# Altium PCB EthernetShield.PcbDoc
Units mil, origin at the board's own origin, x right, y up, seen from the top; angles counter-clockwise.
Board outline 1375 x 745 mil, 2 copper layers (Top Layer, Bottom Layer); 7 components, 12 nets, 38 pads, 16 vias.
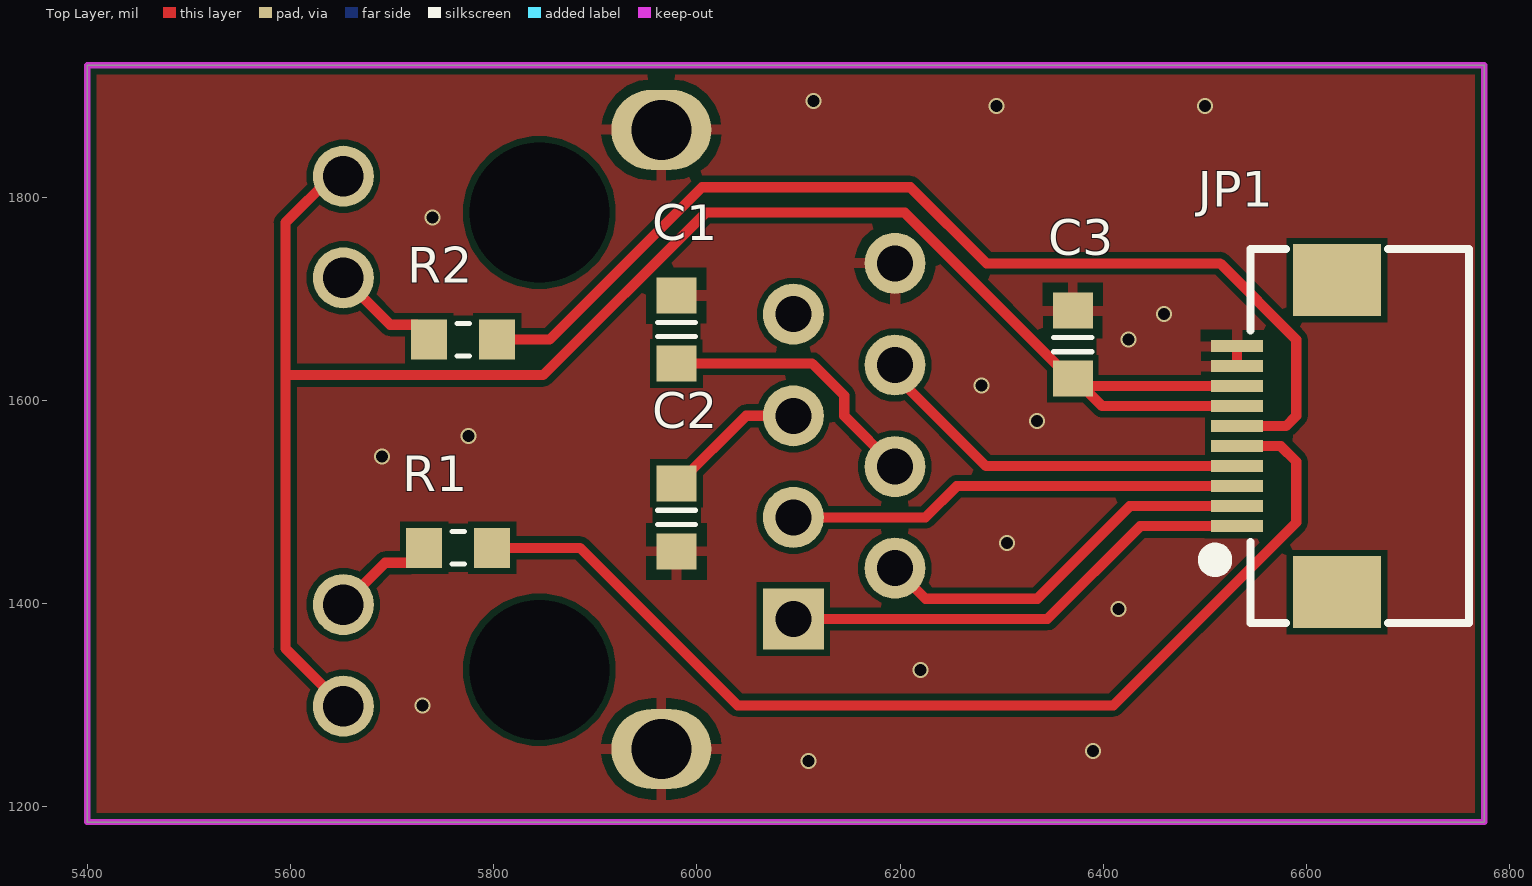
[diagram p0: Top Layer view]
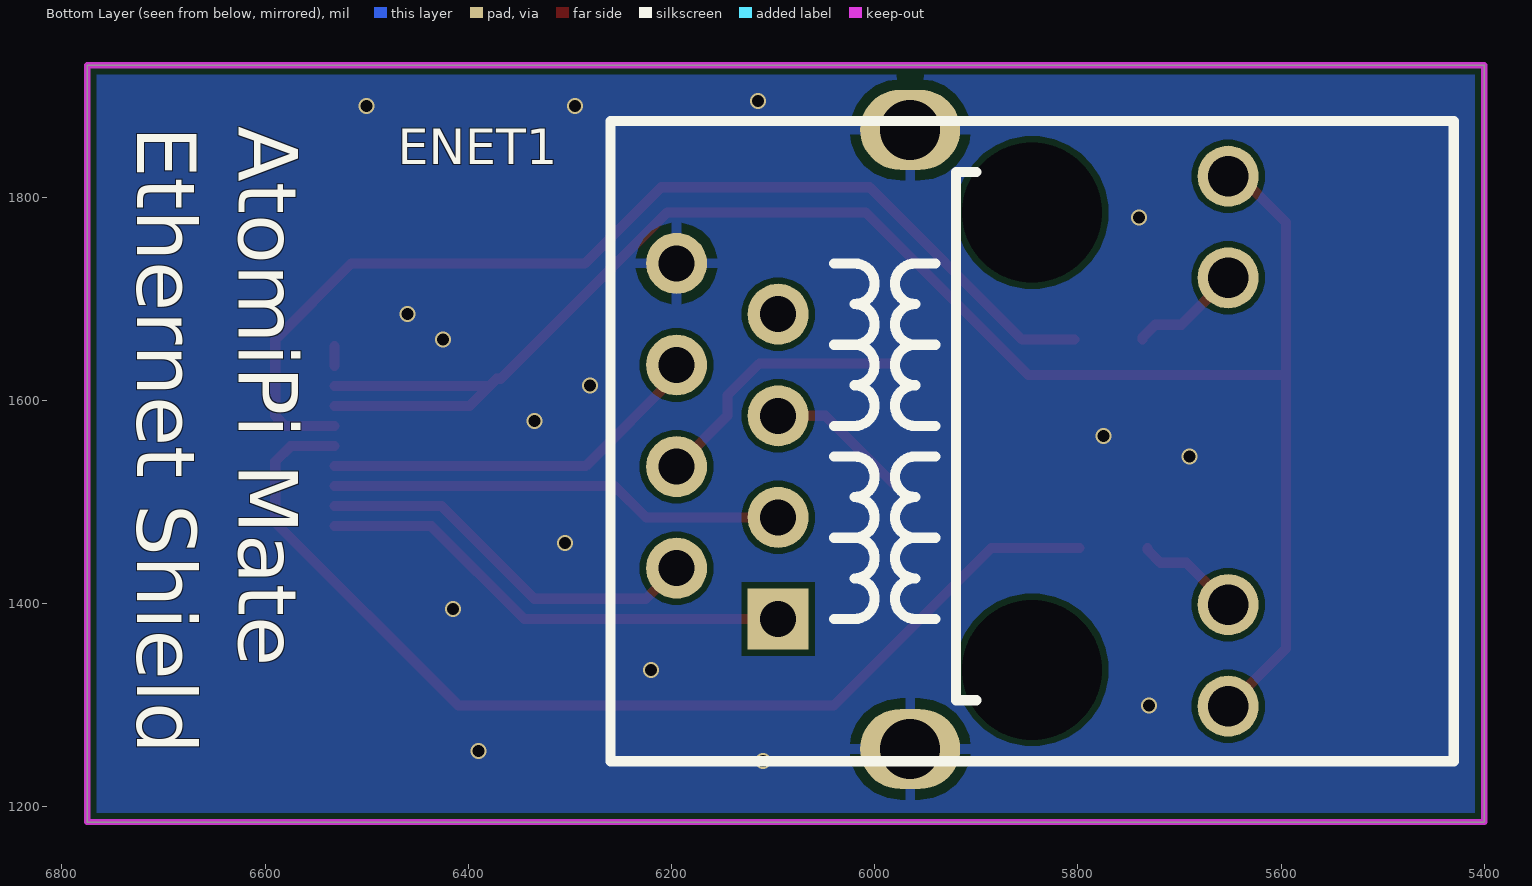
[diagram p1: Bottom Layer view, seen from below]
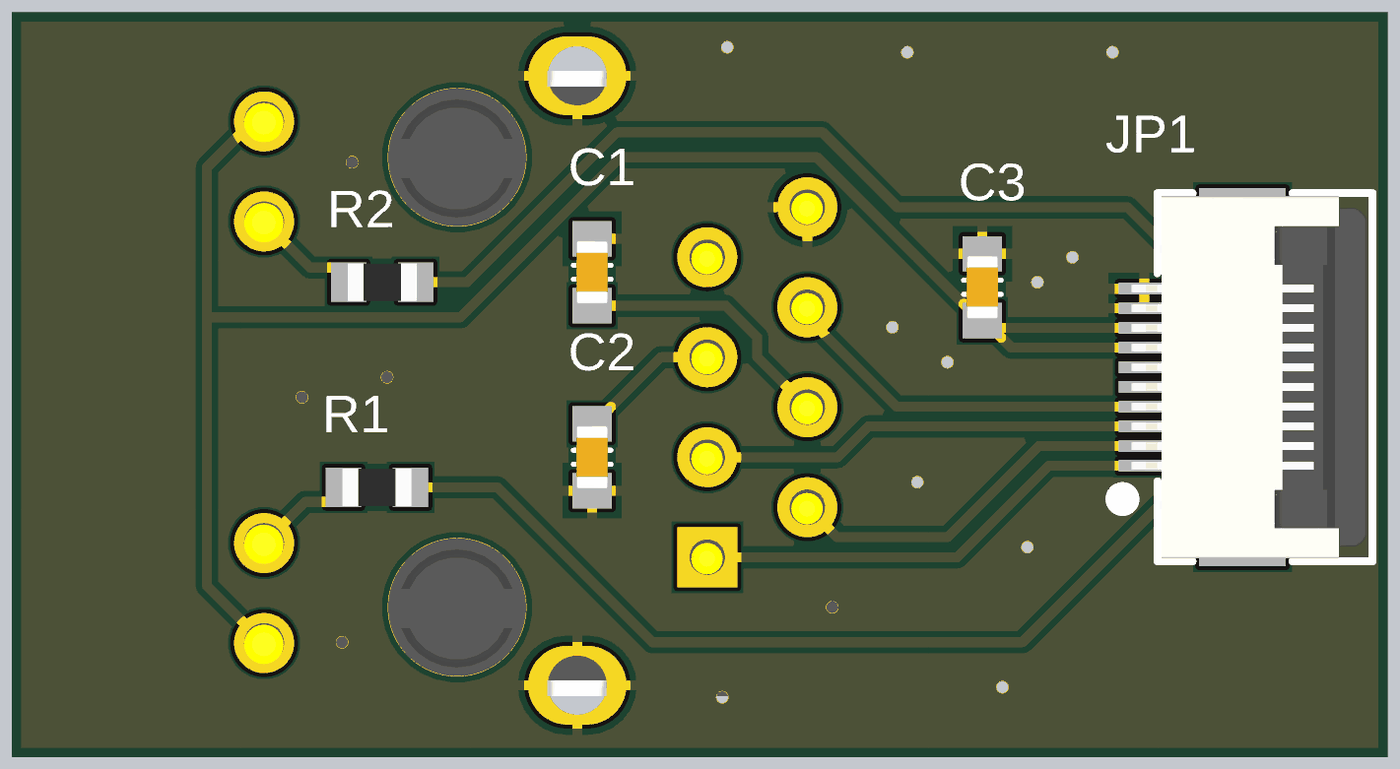
[diagram p2: 3D render of the assembled board from above, using the file's embedded part models]

## Layer stack, top to bottom
Top Solder: solder mask 0.4, Solder Resist, Dk 3.5
Top Layer: signal copper 1.4
Dielectric 1: dielectric 12.6, FR-4, Dk 4.8
Bottom Layer: signal copper 1.4
Bottom Solder: solder mask 0.4, Solder Resist, Dk 3.5

## Board outline
5400,1185 6775,1185 6775,1930 5400,1930

## Design rules (kind name [scope] priority, off if disabled: settings)
Clearance [All] p1: gap=6 ignorepadtopadclearanceinfootprint=FALSE
PolygonConnect [All] p1: connectstyle=Relief reliefconductorwidth=10 reliefentries=4 polygonreliefangle="90 Angle" airgapwidth=10
RoutingVias [All] p1: holewidth=28 width=50 viastyle="Through Hole" minholewidth=28 minwidth=50 maxholewidth=28 maxwidth=50
SolderMaskExpansion [All] p1: expansion=4 istentingtop=FALSE
Width [All] p1: maxlimit=10 minlimit=10 preferedwidth=10
30 further rules are at their usual default settings.

## Components (designator, comment, footprint, x,y, rotation, side; value= is the part's Value field where it differs from the comment)
C1 "104" 0603-C 5980,1670 r270 top
C2 "104" 0603-C 5980,1485 r90 top
C3 "104" 0603-C 6370,1655 r270 top
ENET1 "HR911105A" RJ-45A12 5652.09,1299.17 r180 bottom
JP1 "FPC1.0-10P" "FPC0.5 2H-WS-10P" 6630,1565 r90 top
R1 "22R" 0603-R 5765,1455 r0 top
R2 "22R" 0603-R 5770,1660 r0 top

## Footprints (in the part's own frame and the unit in brackets; to place one, negate y for a bottom-side part, rotate by r counter-clockwise, add the part's x,y. Pads: shape width x height; smd on the part's side, far side on the other; paste and mask are expansions set on the pad)
0603-C [mm]
  rect 0.9x1 smd: 1(-0.85,0) 2(0.85,0)
  Top Layer pour cut-out: -0.4,0.6 0.4,0.6 0.4,-0.6 -0.4,-0.6
  silkscreen extent -0.18,-0.48 0.18,0.48, body extent -0.8,-0.4 0.8,0.4, height 0.8
0603-R [mm]
  rect 0.9x1 smd: 1(-0.85,0) 2(0.85,0)
  Top Layer pour cut-out: -0.4,0.6 0.4,0.6 0.4,-0.6 -0.4,-0.6
  silkscreen extent -0.15,-0.41 0.15,0.41, body extent -0.87,-0.47 0.88,0.48, height 0.54
"FPC0.5 2H-WS-10P" [mm] "长：9.2mm，宽：5.2mm，高：2mm"
  rect 1.8x2.2 smd: 0(-3.9,0) 0(3.9,0)
  rect 0.3x1.3 smd: 1(-2.25,2.497) 2(-1.75,2.497) 3(-1.25,2.497) 4(-0.75,2.497) 5(-0.25,2.497) 6(0.25,2.497) 7(0.75,2.497) 8(1.25,2.497) 9(1.75,2.497) 10(2.25,2.497)
  silkscreen extent -4.67,-3.3 4.67,3.23, body extent -4.6,-3.15 4.6,2.85, height 2
RJ-45A12 [mil]
  round 130 hole 137.8: 0(-192.91,35.83) 0(-192.91,485.83)
  rect 60x60 hole 35.43: 1(-442.91,85.83)
  round 60 hole 35.43: 2(-542.91,135.83) 3(-442.91,185.83) 4(-542.91,235.83) 5(-442.91,285.83) 6(-542.91,335.83) 7(-442.91,385.83) 8(-542.91,435.83)
  round 60 hole 40: 9(0,0) 10(0,100) 11(0,421.65) 12(0,521.65)
  oval 98.43x78.74 hole 59.06: 13(-312.99,-42.13) 14(-312.99,567.32)
  silkscreen extent -608,-54 222,576, body extent -605,-53 237,572, height 59

## Part data
C1 C2 C3: library part CAP, "陶瓷电容"
ENET1: "带灯以太网接口", BOM名称=带灯以太网接口, 学习资源=www.ooocke.com, 版权归属=源创客
JP1: library part FPC_10P, "FPC连接器", BOM名称=FPC连接器, 学习资源=www.ooocke.com, 版权归属=源创客
R1 R2: library part RES, "0603_R"

## Via types
v1: diameter 15.75, hole 11.81, Top Layer to Bottom Layer, tented both sides, 16 vias

## Nets (pads, with @x,y where several pads share a name; then routed paths per layer and width w, separated by ;. In a path a pad name is that pad's centre, name@x,y a point inside that pad or via, vN(x,y) a via of type N, cw(c..) or ccw(c..) an arc to the next point about the centre after c; other vN are vias at no path point)
3V3: C3.2 ENET1.9 ENET1.12 JP1.7 JP1.8 | length 1809.8
  Top Layer w10: ENET1.9 5595,1356.26 5595,1625 ; ENET1.12 5640.82,1820.82 5595,1775 5595,1625 ; JP1.7 6398.98,1594.53 C3.2@6379.29,1614.21 ; JP1.8 C3.2@6379.29,1614.21 ; 5595,1625 5848.58,1625 6008.58,1785 6204.57,1785 6368.03,1621.54 C3.2 6371.97,1621.54 C3.2@6379.29,1614.21
EPHY-LINK-LED: JP1.6 R2.2 | length 1048.3
  Top Layer w10: R2.2 5855,1660 6005,1810 6210,1810 6285,1735 6515,1735 6590,1660 6590,1585 6579.84,1574.84 JP1.6
EPHY-RXN: ENET1.6 JP1.4 | length 383.8
  Top Layer w10: ENET1.6 6195,1625 6284.53,1535.47 JP1.4
EPHY-RXP: ENET1.3 JP1.3 | length 449.4
  Top Layer w10: ENET1.3 6225,1485 6255.79,1515.79 JP1.3
EPHY-SPD-LED: JP1.5 R1.2 | length 1054.9
  Top Layer w10: R1.2 5885,1455 6040,1300 6410,1300 6590,1480 6590,1540 6574.84,1555.16 JP1.5
EPHY-TXN: ENET1.2 JP1.2 | length 386.9
  Top Layer w10: ENET1.2 6225,1405 6335,1405 6426.1,1496.1 JP1.2
EPHY-TXP: ENET1.1 JP1.1 | length 474.6
  Top Layer w10: ENET1.1 6345,1385 6436.42,1476.42 JP1.1
GND: C1.1 C2.1 C3.1 ENET1.8 ENET1.13 ENET1.14 JP1.9 JP1.10 | length 19.7
  Top Layer w10: JP1.9 JP1.10
  other v1: 6110,1245 6390,1255 5730,1300 6220,1335 6415,1395 6305,1460 5690,1545 5775,1565 6335,1580 6280,1615 6425,1660 6460,1685 5740,1780 6295,1890 6500,1890 6115,1895
NetC1_2: C1.2 ENET1.4 | length 268.8
  Top Layer w10: C1.2 6113.46,1636.54 6145,1605 6145,1585 ENET1.4
NetC2_2: C2.2 ENET1.5 | length 142.6
  Top Layer w10: C2.2 5981.97,1518.46 6048.5,1585 ENET1.5
NetENET1_10: ENET1.10 R1.1 | length 103.7
  Top Layer w10: ENET1.10 5693.23,1440.31 5718.82,1440.31 5731.54,1453.03 R1.1
NetENET1_11: ENET1.11 R2.1 | length 110.8
  Top Layer w10: ENET1.11 5698.22,1674.69 5723.82,1674.69 5736.54,1661.97 R2.1
pads on no net: ENET1.0 ENET1.7 JP1.0

## Polygon pours and split planes (outlines as drawn)
GND on Top Layer "GND_L01_P000" (solid, pour order 0): 6775,1930 5400,1930 5400,1185 6775,1185
GND on Bottom Layer "GND_L02_P001" (solid, pour order 1): 6775,1930 5400,1930 5400,1185 6775,1185

## Keep-outs
Keep-Out Layer:
  the board outline again, w6

## Silkscreen, mask and mechanical layers (free items; w line width, h text height)
Bottom Overlay:
  text "AtomiPi Mate / Ethernet Shield" at 6745,1870 h100 r90